# EAGLE board bk-cir1 (EAGLE 9.1.0)
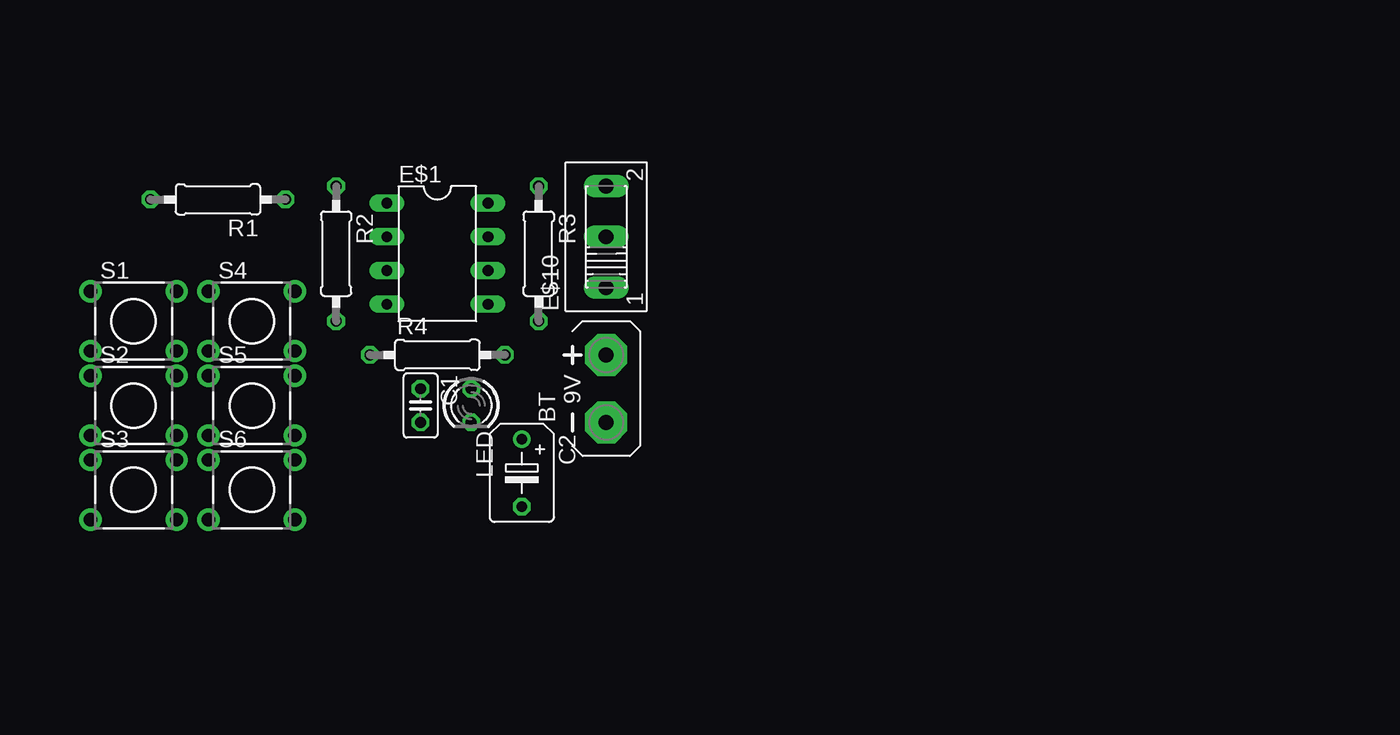
[diagram p0: board, top side]
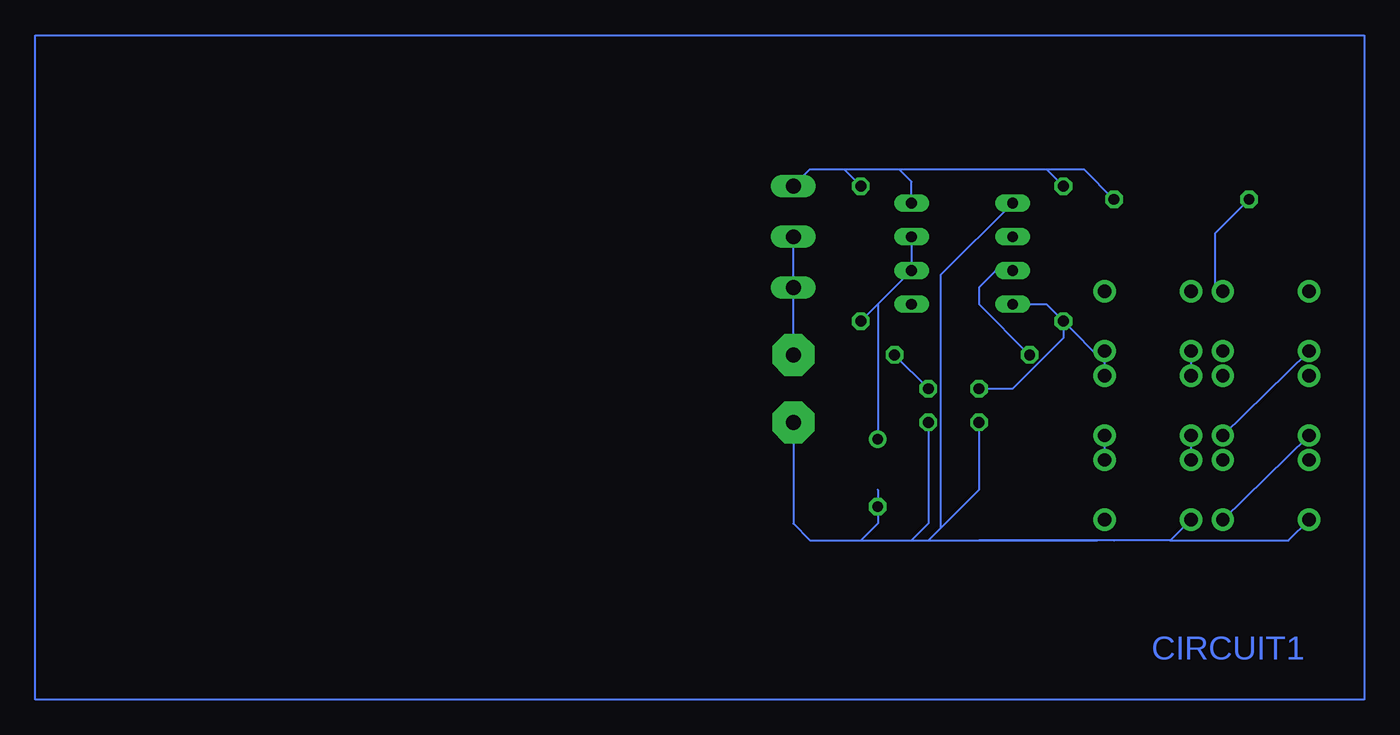
[diagram p1: board, bottom side, seen from below]

No outline drawn. Coordinates in mm, seen from the top.
Copper layers (1*16): Top 0.035mm / dielectric 1.5mm / Bottom 0.035mm
Design rules "default": minimum track width 6mil, minimum drill 0.35mm, track to track 6mil, track to pad 6mil, pad to pad 6mil, via to via 6mil, smd to smd 6mil, copper to edge 40mil, drill to drill 6mil, minimum pad ring 10mil, minimum via ring 8mil, stop-mask expansion 4mil, vias tented up to drill 0mil, thermal gap 10mil

## Footprints (pad centres in the part's own frame; a part is rotated, then mirrored left to right if it is on the bottom)
AB9V = drill 1.118 pad 3.15 octagon: + 0,2.54; - 0,-2.54
C025-025X050 = drill 0.813 octagon: 1 -1.27,0; 2 1.27,0
B45181B = drill 0.813: + -2.54,0 | drill 0.813 octagon: - 2.54,0
DIL08 = drill 0.813 long: 1 -3.81,-3.81; 2 -1.27,-3.81; 3 1.27,-3.81; 4 3.81,-3.81; 5 3.81,3.81; 6 1.27,3.81; 7 -1.27,3.81; 8 -3.81,3.81
255SB = drill 1.118 long: 1 -3.81,0; 2 0,0; 3 3.81,0
LED3MM = drill 0.813 octagon: A -1.27,0; K 1.27,0
0207/10 = drill 0.813 octagon: 1 -5.08,0; 2 5.08,0
TL1105 = drill 1 pad 1.676: 1 -2.25,3.25; 2 2.25,3.25; 3 -2.25,-3.25; 4 2.25,-3.25

## Placement (x,y rotation side)
BT  [AB9V]  42.96,23.4 0 top
C1  0.1uF  [C025-025X050]  28.99,22.13 270 top
C2  1uF  [B45181B]  36.61,17.05 270 top
E$1  [DIL08]  30.26,33.56 270 top
E$10  [255SB]  42.96,34.83 90 top
LED  [LED3MM]  32.8,22.13 270 top
R1  100k  [0207/10]  13.75,37.64 180 top
R2  100k  [0207/10]  22.64,33.56 270 top
R3  1M  [0207/10]  37.88,33.56 270 top
R4  470  [0207/10]  30.26,25.94 0 top
S1  [TL1105]  7.4,28.48 270 top
S2  [TL1105]  7.4,22.13 270 top
S3  [TL1105]  7.4,15.78 270 top
S4  [TL1105]  16.29,28.48 270 top
S5  [TL1105]  16.29,22.13 270 top
S6  [TL1105]  16.29,15.78 270 top

## Library data of the parts
BT = battery
C1 C2 R1-R4 = resistor
E$1 = ic-package
E$10 S1-S6 = switch
LED = led

## Nets
S$2: E$1.3 R4.1
S$3: C2.+ E$1.6 E$1.7 R3.2
S$4: BT.+ E$10.1 E$10.2
S$5: E$1.8 E$10.3 R1.1 R2.1 R3.1
S$6: LED.A R4.2
S$7: BT.- C1.2 C2.- E$1.1 LED.K S3.4 S6.4
S$8: C1.1 E$1.4 R2.2 S4.2 S5.1
S$9: S1.4 S2.2
S$10: S5.2 S6.1
S$11: S4.4 S5.3
S$12: S5.4 S6.3
S$13: S2.4 S3.2
S$14: R1.2

## Tracks (layer width: path | path; a pad name or v marks a point on that pad's centre or on a via)
S$2
  Bottom 0.152: E$1.3 27.72,32.29 28.99,31.02 28.99,29.75 R4.1
S$3
  Bottom 0.152: E$1.7 E$1.6 36.61,29.75 | 36.61,29.75 R3.2 | 36.61,29.75 C2.+
S$4
  Bottom 0.152: BT.+ E$10.1 E$10.2
S$5
  Bottom 0.152: E$10.3 41.69,39.91 40.42,39.91 39.15,39.91 | R2.1 23.91,39.91 | 23.91,39.91 22.64,39.91 21.1,39.91 R1.1 | R3.1 39.15,39.91 | 39.15,39.91 35,39.91 | 35,39.91 23.91,39.91 | E$1.8 34.07,38.98 35,39.91
S$6
  Bottom 0.152: LED.A R4.2
S$7
  Bottom 0.152: S6.4 14.6,11.97 | 14.6,11.97 18.83,11.97 20.1,11.97 | 20.1,11.97 28.99,11.97 | C2.- 36.61,15.78 36.61,13.24 37.88,11.97 | BT.- 42.96,13.24 41.69,11.97 40.42,11.97 37.88,11.97 | 37.88,11.97 34.07,11.97 | 34.07,11.97 36.61,11.97 37.88,11.97 | 20.1,11.97 22.64,11.97 25.18,11.97 32.8,11.97 | LED.K 32.8,13.24 34.07,11.97 | 34.07,11.97 32.8,11.97 | C1.2 28.99,15.78 31.89,12.88 | 31.89,12.88 32.8,11.97 | 14.6,11.97 5.71,11.97 S3.4 | E$1.1 31.89,31.93 31.89,12.88
S$8
  Bottom 0.152: C1.1 26.45,23.4 22.64,27.21 R2.2 | E$1.4 23.91,29.75 R2.2 | S4.2 S5.1 19.54,25.38 R2.2
S$9
  Bottom 0.152: S1.4 S2.2
S$10
  Bottom 0.152: S5.2 S6.1
S$11
  Bottom 0.152: S4.4 S5.3
S$12
  Bottom 0.152: S5.4 S6.3
S$13
  Bottom 0.152: S2.4 S3.2
S$14
  Bottom 0.152: 11.21,31.02 11.21,35.1 R1.2
S$15
  Bottom 0.152: 0,0 100,0 100,50 0,50 0,0

## Text on the board
Bottom: CIRCUIT1